# EAGLE board helmholtz-distribution-pcb (EAGLE 9.5.1)
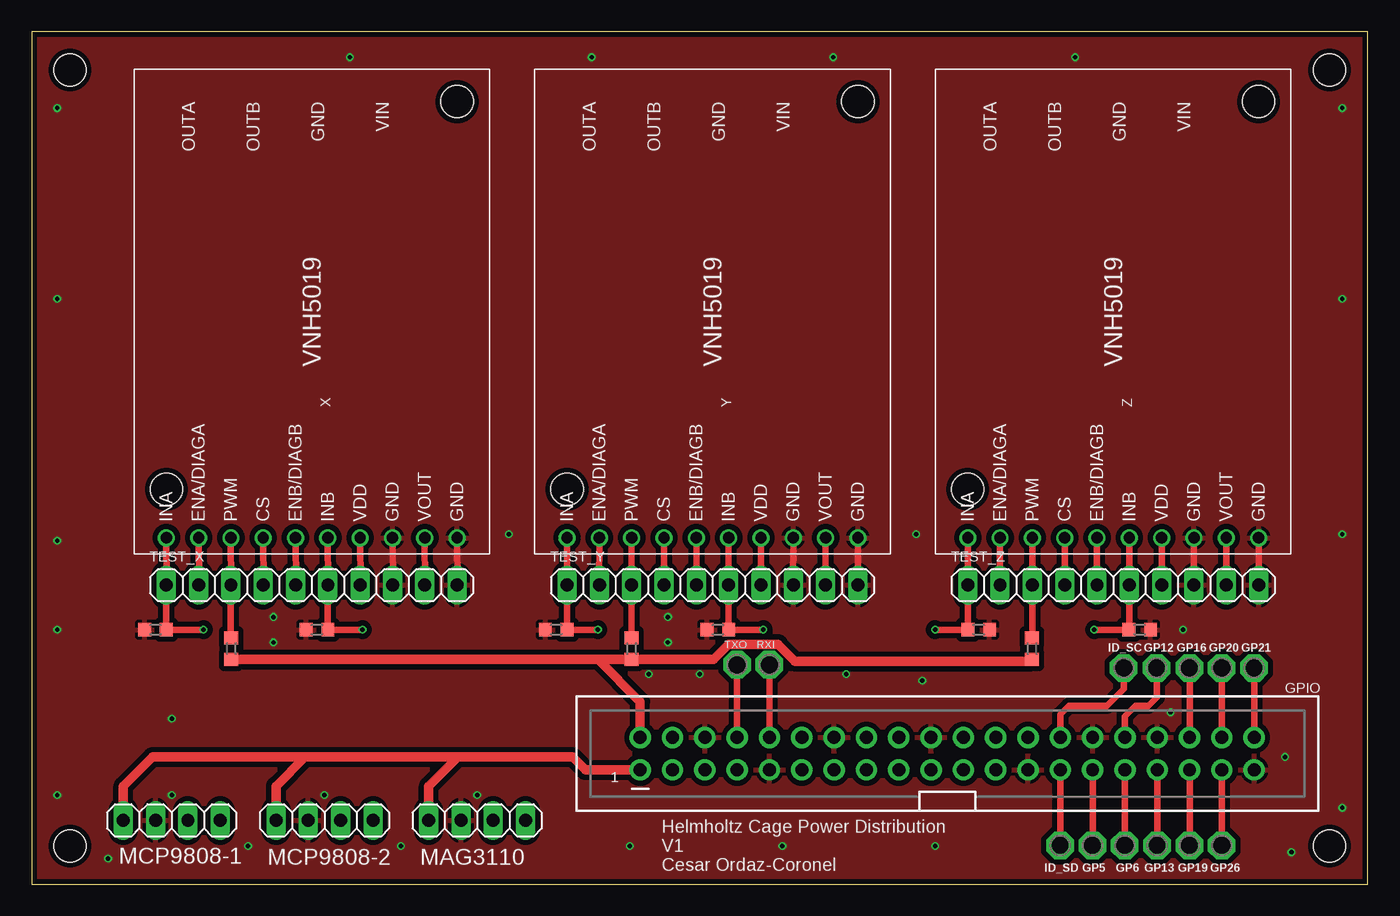
[diagram p0: board, top side]
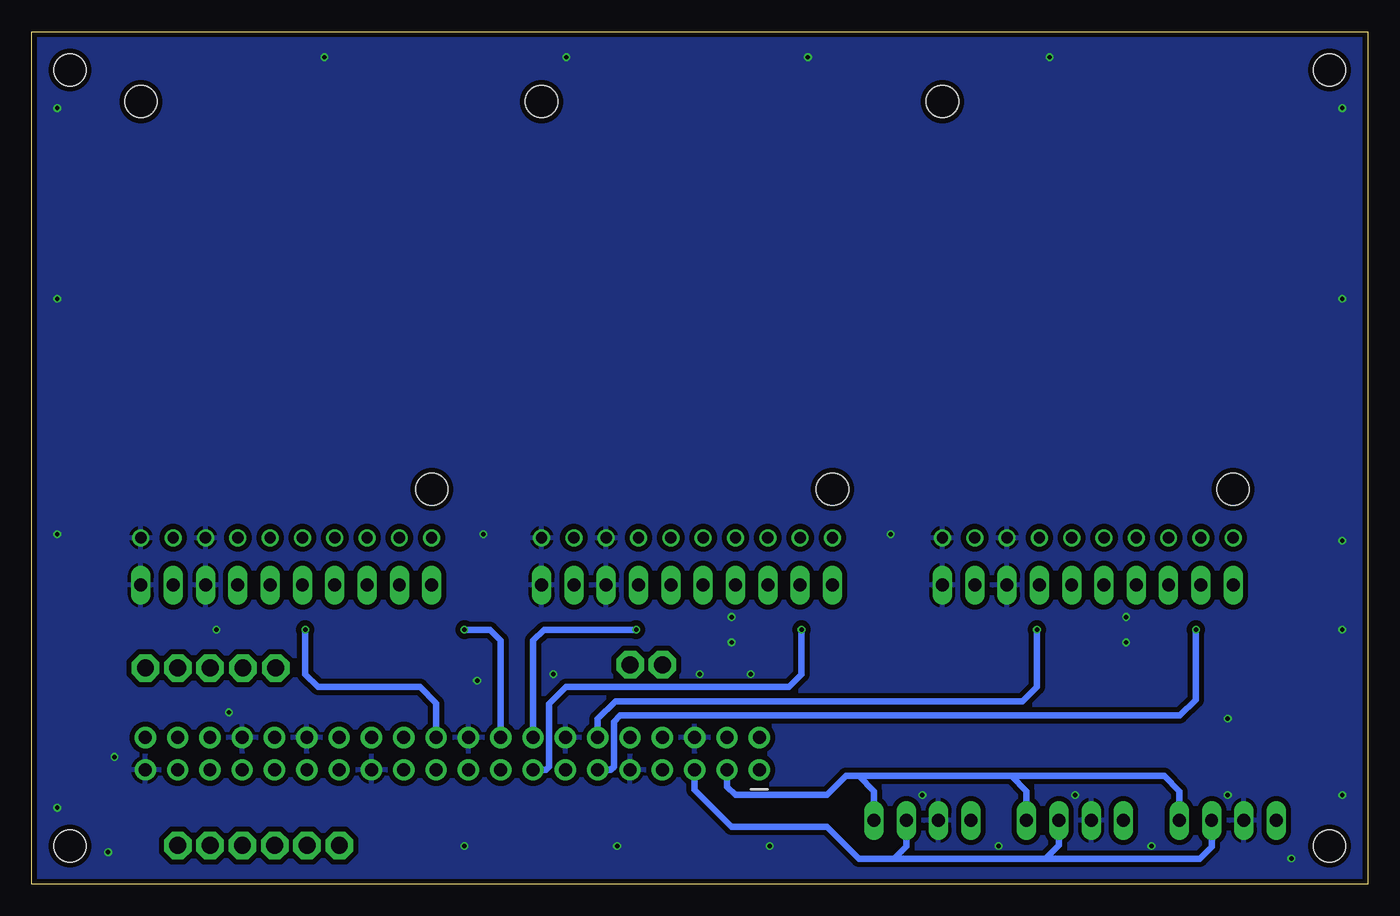
[diagram p1: board, bottom side, seen from below]

Size 105 x 67 mm. Coordinates in mm from the lower left corner, seen from the top.
Outline: 0,0 105,0 105,67 0,67 0,0
Copper layers (1*16): Top 0.035559375mm / dielectric 1.6mm / Bottom 0.035559375mm
Design rules "oshpark-2layer *": minimum track width 6mil, minimum drill 10mil, track to track 6mil, track to pad 6mil, pad to pad 6mil, via to via 6mil, smd to smd 6mil, copper to edge 15mil, drill to drill 6mil, minimum pad ring 5mil, minimum via ring 5mil, stop-mask expansion 2.5mil, vias tented up to drill 0.35mm, thermal gap 10mil
Holes 2.54 mm at 102,64 102,3 3,64 3,3

## Footprints (pad centres in the part's own frame; a part is rotated, then mirrored left to right if it is on the bottom)
P1-13 = drill 1.321 pad 2.159 octagon: TP 0,0
2X20_SHROUDED = drill 1.016 pad 1.676: 1 -1.27,24.13; 2 1.27,24.13; 3 -1.27,21.59; 4 1.27,21.59; 5 -1.27,19.05; 6 1.27,19.05; 7 -1.27,16.51; 8 1.27,16.51; 9 -1.27,13.97; 10 1.27,13.97; 11 -1.27,11.43; 12 1.27,11.43; 13 -1.27,8.89; 14 1.27,8.89; 15 -1.27,6.35; 16 1.27,6.35; 17 -1.27,3.81; 18 1.27,3.81; 19 -1.27,1.27; 20 1.27,1.27; 21 -1.27,-1.27; 22 1.27,-1.27; 23 -1.27,-3.81; 24 1.27,-3.81; 25 -1.27,-6.35; 26 1.27,-6.35; 27 -1.27,-8.89; 28 1.27,-8.89; 29 -1.27,-11.43; 30 1.27,-11.43; 31 -1.27,-13.97; 32 1.27,-13.97; 33 -1.27,-16.51; 34 1.27,-16.51; 35 -1.27,-19.05; 36 1.27,-19.05; 37 -1.27,-21.59; 38 1.27,-21.59; 39 -1.27,-24.13; 40 1.27,-24.13
1X04 = drill 1.016 long: 1 -3.81,0; 2 -1.27,0; 3 1.27,0; 4 3.81,0
R0603 = smd 1 x 1.1: 1 -0.85,0; 2 0.85,0
1X10 = drill 1.016 long: 1 -11.43,0; 2 -8.89,0; 3 -6.35,0; 4 -3.81,0; 5 -1.27,0; 6 1.27,0; 7 3.81,0; 8 6.35,0; 9 8.89,0; 10 11.43,0
VNH5019 = drill 0.889: CS 17.78,-3.81; EBN/DIAGB 17.78,-1.27; ENA/DIAGA 17.78,-8.89; GND@1 17.78,6.35; GND@2 17.78,11.43; INA 17.78,-11.43; INB 17.78,1.27; PWM 17.78,-6.35; VDD 17.78,3.81; VOUT 17.78,8.89 | hole 2.54: -16.51,11.43; 13.97,-11.43

## Placement (x,y rotation side)
GP5  TPPAD1-13  [P1-13]  83.37,3.04 0 top
GP6  TPPAD1-13  [P1-13]  85.91,3.04 0 top
GP12  TPPAD1-13  [P1-13]  88.41,16.99 0 top
GP13  TPPAD1-13  [P1-13]  88.45,3.04 0 top
GP16  TPPAD1-13  [P1-13]  90.99,16.99 0 top
GP19  TPPAD1-13  [P1-13]  90.99,3.04 0 top
GP20  TPPAD1-13  [P1-13]  93.53,16.99 0 top
GP21  TPPAD1-13  [P1-13]  96.07,16.99 0 top
GP26  TPPAD1-13  [P1-13]  93.53,3.04 0 top
ID_SC  TPPAD1-13  [P1-13]  85.83,16.99 0 top
ID_SD  TPPAD1-13  [P1-13]  80.83,3.04 0 top
J1  RASPBERRYPI-40-PIN-GPIO_PTH  [2X20_SHROUDED]  71.95,10.25 90 top
MAG3110  [1X04]  35,5 0 top
MCP9808-1  [1X04]  11,5 0 top
MCP9808-2  [1X04]  23,5 0 top
R2  10K  [R0603]  87.08,20 0 top
R3  10K  [R0603]  74.43,20 0 top
R7  1K  [R0603]  78.62,18.51 270 top
R9  10K  [R0603]  53.92,20 180 top
R10  10K  [R0603]  41.22,20 180 top
R13  1K  [R0603]  47.14,18.51 270 top
R16  10K  [R0603]  22.42,20 180 top
R17  10K  [R0603]  9.72,20 180 top
R20  1K  [R0603]  15.68,18.51 270 top
RXI  TPPAD1-13  [P1-13]  57.97,17.24 0 top
TEST_X  [1X10]  22,23.5 0 top
TEST_Y  [1X10]  53.5,23.5 0 top
TEST_Z  [1X10]  85,23.5 0 top
TXO  TPPAD1-13  [P1-13]  55.43,17.24 0 top
X  VNH5019  [VNH5019]  22,45 270 top
Y  VNH5019  [VNH5019]  53.5,45 270 top
Z  VNH5019  [VNH5019]  85,45 270 top

## Library data of the parts
GP5 GP6 GP12 GP13 GP16 GP19-GP21 GP26 ID_SC ID_SD RXI TXO = testpad
J1 = SparkFun-Connectors; PROD_ID: CONN-12263; SF_ID: PRT-13054
MAG3110 MCP9808-1 MCP9808-2 TEST_X TEST_Y TEST_Z = pinhead
R2 R3 R7 R9 R10 R13 R16 R17 R20 = rcl; SPICEPREFIX: R
X Y Z = HelmholtzCage

## Nets
3.3V: J1.17
5V: J1.4
+3V3: J1.1 MAG3110.1 MCP9808-1.1 MCP9808-2.1
+5V: J1.2 R7.2 R13.2 R20.2
CS_X: TEST_X.4 X.CS
CS_Y: TEST_Y.4 Y.CS
CS_Z: TEST_Z.4 Z.CS
ENA/DIAGA_X: TEST_X.2 X.ENA/DIAGA
ENA/DIAGA_Y: TEST_Y.2 Y.ENA/DIAGA
ENA/DIAGA_Z: TEST_Z.2 Z.ENA/DIAGA
ENB/DIAGB_X: TEST_X.5 X.EBN/DIAGB
ENB/DIAGB_Y: TEST_Y.5 Y.EBN/DIAGB
ENB/DIAGB_Z: TEST_Z.5 Z.EBN/DIAGB
GND: J1.6 J1.9 J1.14 J1.20 J1.25 J1.30 J1.34 J1.39 MAG3110.2 MCP9808-1.2 MCP9808-2.2 R2.2 R3.2 R9.2 R10.2 R16.2 R17.2 TEST_X.8 TEST_X.10 TEST_Y.8 TEST_Y.10 TEST_Z.8 TEST_Z.10 X.GND@1 X.GND@2 Y.GND@1 Y.GND@2 Z.GND@1 Z.GND@2
GPIO1: J1.11 R17.1 TEST_X.1 X.INA
GPIO2: J1.12 R16.1 TEST_X.6 X.INB
GPIO3: J1.15 R10.1 TEST_Y.1 Y.INA
GPIO4: J1.16 R9.1 TEST_Y.6 Y.INB
GPIO5: J1.18 R3.1 TEST_Z.1 Z.INA
GPIO6: J1.22 R2.1 TEST_Z.6 Z.INB
N$1: GP26.TP J1.37
N$2: GP21.TP J1.40
N$3: GP20.TP J1.38
N$4: GP19.TP J1.35
N$5: GP16.TP J1.36
N$6: GP13.TP J1.33
N$7: GP12.TP J1.32
N$8: GP6.TP J1.31
N$9: GP5.TP J1.29
N$10: J1.8 TXO.TP
N$11: J1.10 RXI.TP
N$12: ID_SD.TP J1.27
N$13: ID_SC.TP J1.28
PWM_X: R20.1 TEST_X.3 X.PWM
PWM_Y: R13.1 TEST_Y.3 Y.PWM
PWM_Z: R7.1 TEST_Z.3 Z.PWM
SCL: J1.5 MAG3110.3 MCP9808-1.3 MCP9808-2.3
SDA: J1.3 MAG3110.4 MCP9808-1.4 MCP9808-2.4
VDD_X: TEST_X.7 X.VDD
VDD_Y: TEST_Y.7 Y.VDD
VDD_Z: TEST_Z.7 Z.VDD
VOUT_X: TEST_X.9 X.VOUT
VOUT_Y: TEST_Y.9 Y.VOUT
VOUT_Z: TEST_Z.9 Z.VOUT

## Tracks (layer width: path | path; a pad name or v marks a point on that pad's centre or on a via)
+3V3
  Top 0.75: MCP9808-1.1 7.19,7.69 9.5,10 21.5,10 | MCP9808-2.1 19.19,7.69 21.5,10 | MAG3110.1 31.19,7.69 33.5,10 | 21.5,10 33.5,10 | 33.5,10 42.5,10 43.52,8.98 J1.1
+5V
  Top 0.75: R20.2 44.5,17.66 | 44.5,17.66 R13.2 53.58,17.66 54.76,18.85 58.65,18.85 60,17.5 78.46,17.5 R7.2 | J1.2 47.82,14.34 44.5,17.66
CS_X
  Top 0.5: X.CS 18.22,23.53 TEST_X.4
CS_Y
  Top 0.5: Y.CS TEST_Y.4
CS_Z
  Top 0.5: TEST_Z.4 Z.CS
ENA/DIAGA_X
  Top 0.5: X.ENA/DIAGA 13.14,23.53 TEST_X.2
ENA/DIAGA_Y
  Top 0.5: Y.ENA/DIAGA TEST_Y.2
ENA/DIAGA_Z
  Top 0.5: TEST_Z.2 Z.ENA/DIAGA
ENB/DIAGB_X
  Top 0.5: X.EBN/DIAGB 20.76,23.53 TEST_X.5
ENB/DIAGB_Y
  Top 0.5: Y.EBN/DIAGB TEST_Y.5
ENB/DIAGB_Z
  Top 0.5: TEST_Z.5 Z.EBN/DIAGB
GND  (via drill 0.35)
  Top 0.5: TEST_Z.8 Z.GND@1 | TEST_Z.10 Z.GND@2 | Y.GND@1 TEST_Y.8 | Y.GND@2 TEST_Y.10 | X.GND@2 33.46,23.53 TEST_X.10 | X.GND@1 28.38,23.53 TEST_X.8
  other vias: 50,19 50,21 90.5,20 19,19 19,21 2,20 23,7 11,7 35,7 29,3 17,3 11,13 47,3 59,3 71,3 99,2.5 103,6 103,27.5 69.5,27.5 37.5,27.5 2,27 48.5,16.5 52.5,16.5 64,16.5 70,16 98.5,10 89.5,13.5 2,46 2,61 25,65 44,65 63,65 82,65 103,61 103,46 6,2 2,7
  pour Top (isolate 0.406): 0,0 0,67 105,67 105,0
  pour Bottom (isolate 0.406): 0,0 0,67 105,67 105,0
GPIO1  (via drill 0.35)
  Top 0.5: X.INA 10.6,23.53 TEST_X.1 R17.1 v13.5,20
  Bottom 0.5: J1.11 59.5,8.98 59.25,9.23 59.25,12.75 58.75,13.25 14.75,13.25 13.5,14.5 v13.5,20
GPIO2  (via drill 0.35)
  Top 0.5: X.INB 23.3,23.53 TEST_X.6 R16.1 v26,20
  Bottom 0.5: J1.12 60.52,12.98 59.12,14.38 27.12,14.38 26,15.5 v26,20
GPIO3  (via drill 0.35)
  Top 0.5: Y.INA TEST_Y.1 R10.1 v44.5,20
  Bottom 0.5: J1.15 64.57,8.98 64.34,9.21 64.34,14.16 63,15.5 45.5,15.5 44.5,16.5 v44.5,20
GPIO4  (via drill 0.35)
  Top 0.5: v57.5,20 R9.1 54.77,20.02 TEST_Y.6 Y.INB
  Bottom 0.5: J1.16 65.6,19.15 64.75,20 v57.5,20
GPIO5  (via drill 0.35)
  Top 0.5: 73.54,20.04 R3.1 | v71,20 73.5,20 73.54,20.04 | Z.INA TEST_Z.1 73.57,20.07 73.54,20.04
  Bottom 0.5: J1.18 68.14,19.14 69,20 v71,20
GPIO6  (via drill 0.35)
  Top 0.5: Z.INB TEST_Z.6 86.27,20.04 R2.1 v83.5,20
  Bottom 0.5: J1.22 73.22,14.22 74.5,15.5 82.5,15.5 83.5,16.5 v83.5,20
N$1
  Top 0.5: J1.37 GP26.TP
N$2
  Top 0.5: GP21.TP J1.40
N$3
  Top 0.5: J1.38 GP20.TP
N$4
  Top 0.5: J1.35 GP19.TP
N$5
  Top 0.5: GP16.TP J1.36
N$6
  Top 0.5: GP13.TP J1.33
N$7
  Top 0.5: J1.32 85.92,13.19 86.73,14 87.74,14 88.41,14.67 GP12.TP
N$8
  Top 0.5: J1.31 GP6.TP
N$9
  Top 0.5: J1.29 GP5.TP
N$10
  Top 0.5: TXO.TP J1.8
N$11
  Top 0.5: J1.10 RXI.TP
N$12
  Top 0.5: J1.27 ID_SD.TP
N$13
  Top 0.5: J1.28 80.84,13.34 81.5,14 84.5,14 85.83,15.33 ID_SC.TP
PWM_X
  Top 0.5: X.PWM 15.68,23.53 TEST_X.3 15.65,19.39 R20.1
PWM_Y
  Top 0.5: Y.PWM TEST_Y.3 R13.1
PWM_Z
  Top 0.5: Z.PWM TEST_Z.3 78.65,19.39 R7.1
SCL
  Bottom 0.5: MAG3110.3 36.27,2.96 37.23,2 | MCP9808-2.3 24.27,3.06 25.33,2 | MCP9808-1.3 12.27,2.94 13.21,2 25.33,2 | 25.33,2 37.23,2 | 37.23,2 40,2 42.5,4.5 50,4.5 52.9,7.4 J1.5
SDA
  Bottom 0.5: MAG3110.4 38.81,7.31 40,8.5 | MCP9808-2.4 26.81,7.31 28,8.5 | MCP9808-1.4 14.81,7.31 16,8.5 28,8.5 | 28,8.5 40,8.5 | 40,8.5 41,8.5 42.5,7 49.7,7 50.36,7.66 J1.3
VDD_X
  Top 0.5: X.VDD 25.84,23.53 TEST_X.7
VDD_Y
  Top 0.5: Y.VDD TEST_Y.7
VDD_Z
  Top 0.5: TEST_Z.7 Z.VDD
VOUT_X
  Top 0.5: X.VOUT 30.92,23.53 TEST_X.9
VOUT_Y
  Top 0.5: Y.VOUT TEST_Y.9
VOUT_Z
  Top 0.5: TEST_Z.9 Z.VOUT

## Text on the board
tPlace: Helmholtz Cage Power Distribution | V1 | Cesar Ordaz-Coronel
tNames: X | Y | Z | GPIO | 1